# Altium PCB 6th design.PcbDoc
Units mil, origin at the board's own origin, x right, y up, seen from the top; angles counter-clockwise.
Board outline 6000 x 4000 mil, 2 copper layers (Top Layer, Bottom Layer); 142 components, 101 nets, 386 pads, 48 vias.
Unrouted connection lines stored in the file: 71.
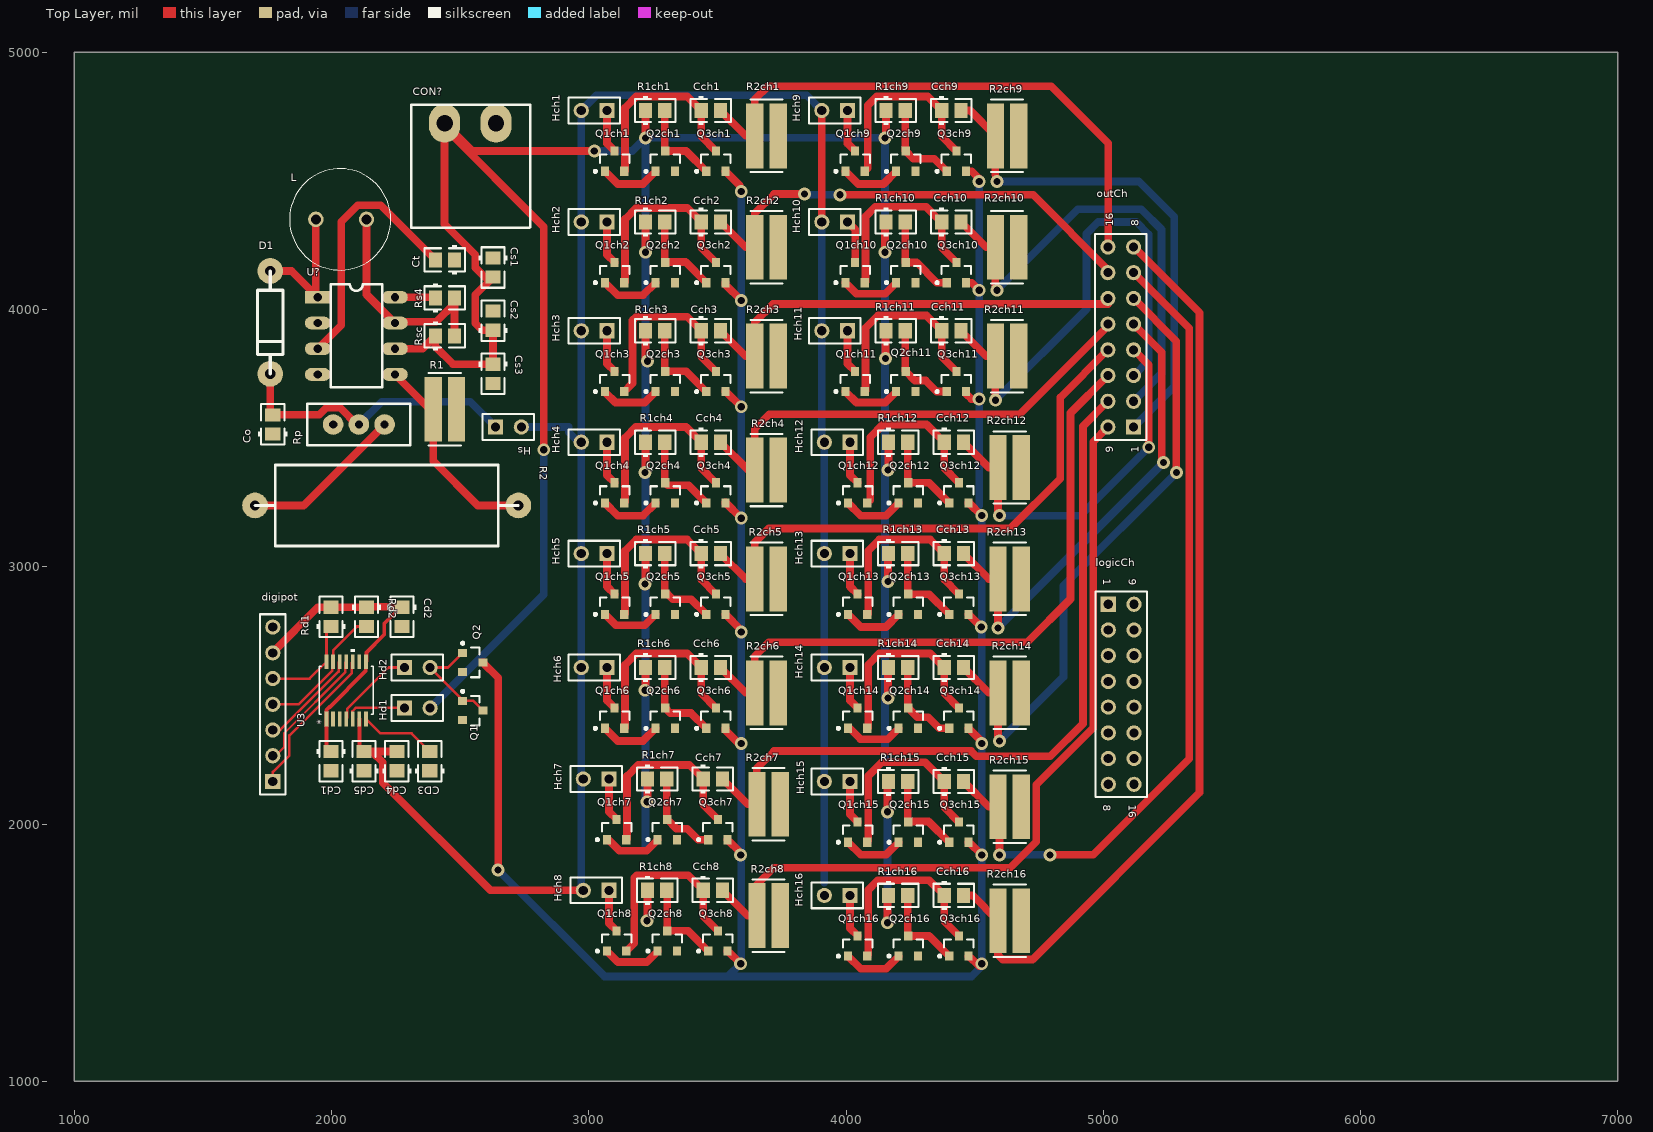
[diagram p0: Top Layer view]
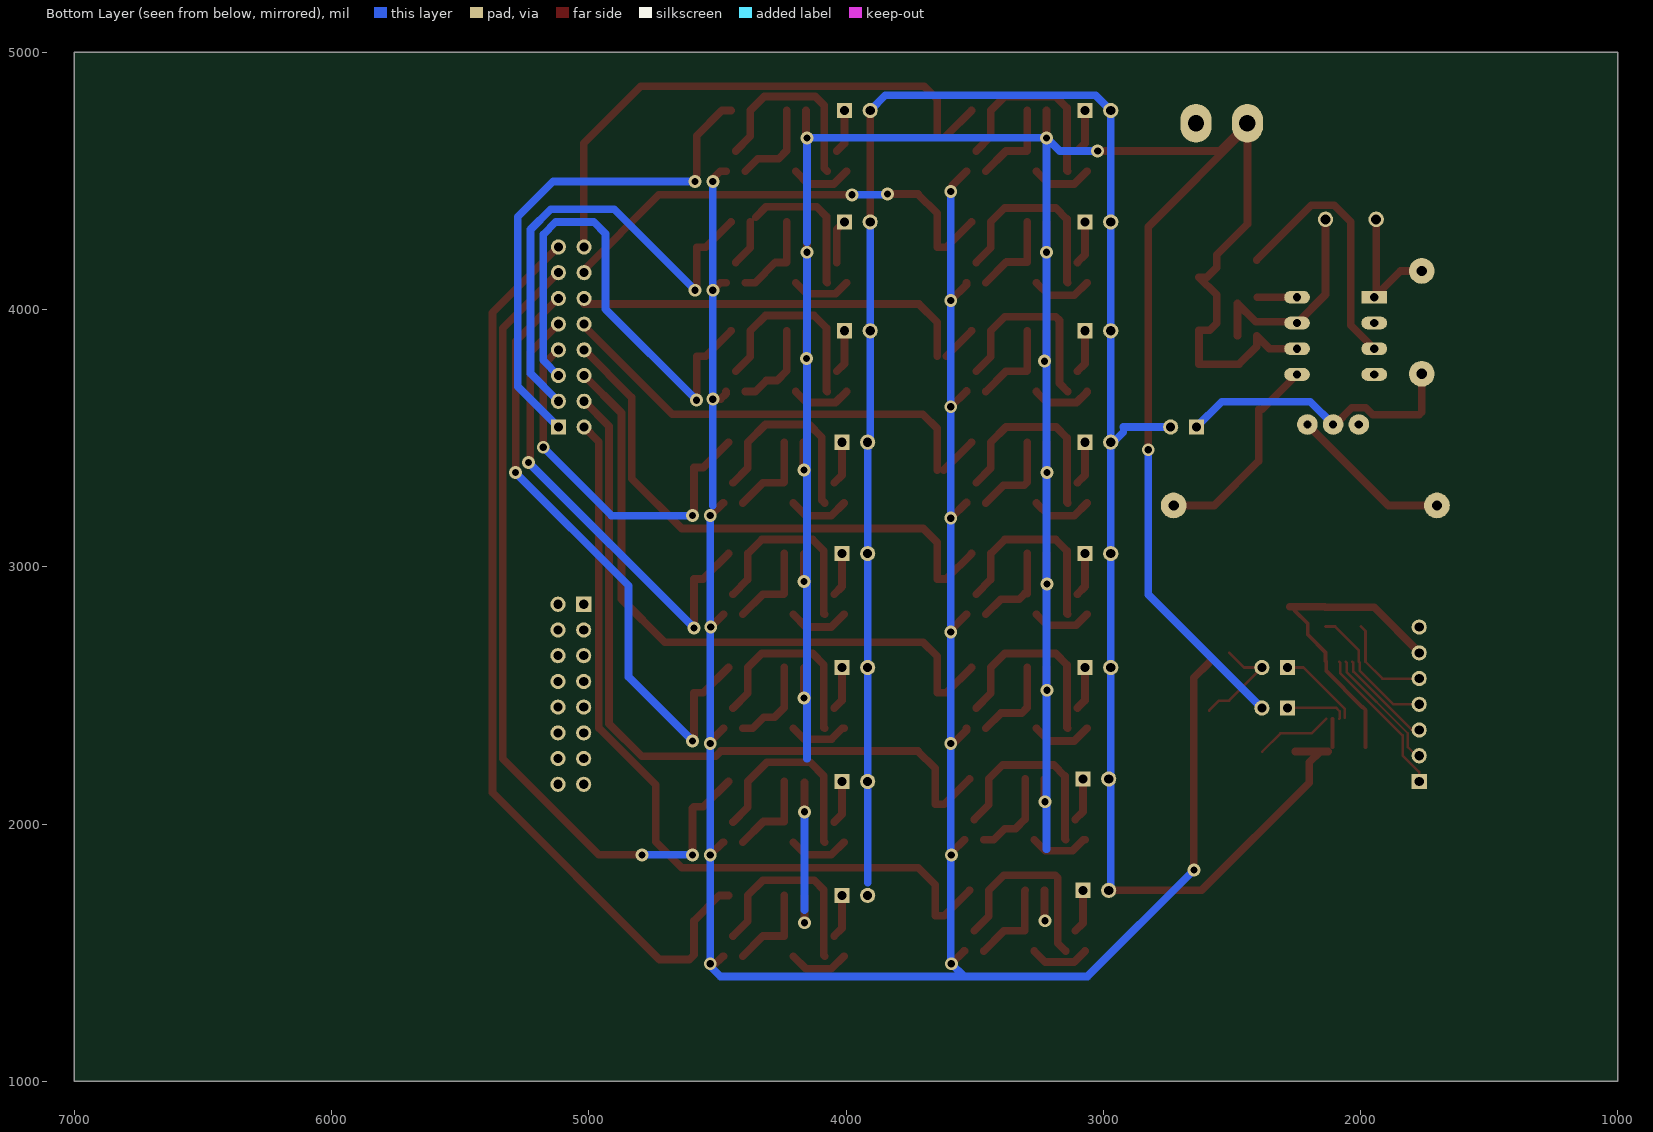
[diagram p1: Bottom Layer view, seen from below]

## Layer stack, top to bottom
Top Solder: solder mask 0.4, Solder Resist, Dk 3.5
Top Layer: signal copper 1.4
Dielectric 1: dielectric 12.6, FR-4, Dk 4.8
Bottom Layer: signal copper 1.4
Bottom Solder: solder mask 0.4, Solder Resist, Dk 3.5

## Board outline
1000,1000 7000,1000 7000,5000 1000,5000

## Design rules (kind name [scope] priority, off if disabled: settings)
Clearance [All] p1: gap=10
PolygonConnect [All] p1: connectstyle=Relief reliefconductorwidth=10 reliefentries=4 polygonreliefangle="90 Angle" airgapwidth=10
RoutingVias [All] p1: holewidth=28 width=50 viastyle="Through Hole" minholewidth=6 minwidth=50 maxholewidth=28 maxwidth=50
SolderMaskExpansion [All] p1: expansion=4
Width [All] p1: maxlimit=30 minlimit=6 preferedwidth=30
30 further rules are at their usual default settings.

## Classes and differential pairs
component class step-up: Co Cs1 Cs2 Cs3 Ct D1 Hs L R1 R2 Rp Rs4 Rsc U?
component class digipot: Cd1 Cd2 CD3 Cd4 Cd5 digipot Hd1 Hd2 Rd1 Rd2 U3
component class "6th design": Cch1 Cch2 Cch3 Cch4 Cch5 Cch6 Cch7 Cch8 Cch9 Cch10 Cch11 Cch12 Cch13 Cch14 Cch15 Cch16 CON? Hch1 Hch2 Hch3 Hch4 Hch5 Hch6 Hch7 Hch8 Hch9 Hch10 Hch11 Hch12 Hch13 Hch14 Hch15 Hch16 logicCh outCh Q1 Q1ch1 Q1ch2 Q1ch3 Q1ch4 Q1ch5 Q1ch6 Q1ch7 Q1ch8 Q1ch9 Q1ch10 Q1ch11 Q1ch12 Q1ch13 Q1ch14 Q1ch15 Q1ch16 Q2 Q2ch1 Q2ch2 Q2ch3 Q2ch4 Q2ch5 Q2ch6 Q2ch7 Q2ch8 Q2ch9 Q2ch10 Q2ch11 Q2ch12 Q2ch13 Q2ch14 Q2ch15 Q2ch16 Q3ch1 Q3ch2 Q3ch3 Q3ch4 Q3ch5 Q3ch6 Q3ch7 Q3ch8 Q3ch9 Q3ch10 Q3ch11 Q3ch12 Q3ch13 Q3ch14 Q3ch15 Q3ch16 R1ch1 R1ch2 R1ch3 R1ch4 R1ch5 R1ch6 R1ch7 R1ch8 R1ch9 R1ch10 R1ch11 R1ch12 R1ch13 R1ch14 R1ch15 R1ch16 R2ch1 R2ch2 R2ch3 R2ch4 R2ch5 R2ch6 R2ch7 R2ch8 R2ch9 R2ch10 R2ch11 R2ch12 R2ch13 R2ch14 R2ch15 R2ch16

## Components (designator, comment, footprint, x,y, rotation, side; value= is the part's Value field where it differs from the comment)
Cch1 "Cap-NP" CC2012-0805 3474.41,4773.62 r0 top
Cch2 "Cap-NP" CC2012-0805 3474.41,4340.55 r0 top
Cch3 "Cap-NP" CC2012-0805 3474.41,3917.32 r0 top
Cch4 "Cap-NP" CC2012-0805 3474.41,3484.25 r0 top
Cch5 "Cap-NP" CC2012-0805 3474.41,3051.18 r0 top
Cch6 "Cap-NP" CC2012-0805 3474.41,2608.27 r0 top
Cch7 "Cap-NP" CC2012-0805 3482.28,2175.2 r0 top
Cch8 "Cap-NP" CC2012-0805 3482.28,1742.13 r0 top
Cch9 "Cap-NP" CC2012-0805 4409.45,4773.62 r0 top
Cch10 "Cap-NP" CC2012-0805 4409.45,4340.55 r0 top
Cch11 "Cap-NP" CC2012-0805 4409.45,3917.32 r0 top
Cch12 "Cap-NP" CC2012-0805 4419.29,3484.25 r0 top
Cch13 "Cap-NP" CC2012-0805 4419.29,3051.18 r0 top
Cch14 "Cap-NP" CC2012-0805 4419.29,2608.27 r0 top
Cch15 "Cap-NP" CC2012-0805 4419.29,2165.35 r0 top
Cch16 "Cap-NP" CC2012-0805 4419.29,1722.44 r0 top
Cd1 "Cap-NP" CC2012-0805 1998.03,2244.09 r270 top
Cd2 "Cap-NP" CC2012-0805 2273.62,2805.12 r270 top
CD3 "Cap-NP" CC2012-0805 2381.87,2244.09 r90 top
Cd4 "Cap-NP" CC2012-0805 2253.94,2244.09 r90 top
Cd5 "Cap-NP" CC2012-0805 2125.98,2244.09 r90 top
Co "Cap-NP" CC2012-0805 1771.65,3553.15 r90 top
CON? "SOCKETS TERMINAL BLOCK 2PIN" "Sockets Terminal Block 2Pin" 2539.37,4724.41 r0 top
Cs1 "Cap-NP" CC2012-0805 2627.97,4163.39 r270 top
Cs2 "Cap-NP" CC2012-0805 2627.93,3956.69 r90 top
Cs3 "Cap-NP" CC2012-0805 2627.94,3750 r270 top
Ct "Cap-NP" CC2012-0805 2440.94,4192.91 r180 top
D1 "DIODE" D1N40XX 1761.81,3750 r90 top
digipot "Header 7" HDR1X7 1771.65,2165.35 r90 top
Hch1 "H2" HDR1X2 3070.87,4773.62 r180 top
Hch2 "H2" HDR1X2 3070.87,4340.55 r180 top
Hch3 "H2" HDR1X2 3070.87,3917.32 r180 top
Hch4 "H2" HDR1X2 3070.87,3484.25 r180 top
Hch5 "H2" HDR1X2 3070.87,3051.18 r180 top
Hch6 "H2" HDR1X2 3070.87,2608.27 r180 top
Hch7 "H2" HDR1X2 3078.74,2175.2 r180 top
Hch8 "H2" HDR1X2 3078.74,1742.13 r180 top
Hch9 "H2" HDR1X2 4005.91,4773.62 r180 top
Hch10 "H2" HDR1X2 4005.91,4340.55 r180 top
Hch11 "H2" HDR1X2 4005.91,3917.32 r180 top
Hch12 "H2" HDR1X2 4015.75,3484.25 r180 top
Hch13 "H2" HDR1X2 4015.75,3051.18 r180 top
Hch14 "H2" HDR1X2 4015.75,2608.27 r180 top
Hch15 "H2" HDR1X2 4015.75,2165.35 r180 top
Hch16 "H2" HDR1X2 4015.75,1722.44 r180 top
Hd1 "Hd1" HDR1X2 2283.46,2450.79 r0 top
Hd2 "Hd2" HDR1X2 2283.46,2608.27 r0 top
Hs "Hs" HDR1X2 2637.8,3543.31 r0 top
L "Component_1" PCBComponent_1 1938.98,4350.39 r0 top
logicCh "Header 8X2A" HDR2X8_CEN 5019.69,2854.33 r270 top
outCh "Header 8X2A" HDR2X8_CEN 5118.11,3543.31 r90 top
Q1 "MMBT4401LT1" ONSC-SOT-23-3-318-08_V 2549.21,2440.94 r0 top
Q1ch1 "MMBT4401LT1" ONSC-SOT-23-3-318-08_V 3100.39,4576.77 r90 top
Q1ch2 "MMBT4401LT1" ONSC-SOT-23-3-318-08_V 3100.39,4143.7 r90 top
Q1ch3 "MMBT4401LT1" ONSC-SOT-23-3-318-08_V 3100.39,3720.47 r90 top
Q1ch4 "MMBT4401LT1" ONSC-SOT-23-3-318-08_V 3100.39,3287.4 r90 top
Q1ch5 "MMBT4401LT1" ONSC-SOT-23-3-318-08_V 3100.39,2854.33 r90 top
Q1ch6 "MMBT4401LT1" ONSC-SOT-23-3-318-08_V 3100.39,2411.42 r90 top
Q1ch7 "MMBT4401LT1" ONSC-SOT-23-3-318-08_V 3108.27,1978.35 r90 top
Q1ch8 "MMBT4401LT1" ONSC-SOT-23-3-318-08_V 3108.27,1545.28 r90 top
Q1ch9 "MMBT4401LT1" ONSC-SOT-23-3-318-08_V 4035.43,4576.77 r90 top
Q1ch10 "MMBT4401LT1" ONSC-SOT-23-3-318-08_V 4035.43,4143.7 r90 top
Q1ch11 "MMBT4401LT1" ONSC-SOT-23-3-318-08_V 4035.43,3720.47 r90 top
Q1ch12 "MMBT4401LT1" ONSC-SOT-23-3-318-08_V 4045.28,3287.4 r90 top
Q1ch13 "MMBT4401LT1" ONSC-SOT-23-3-318-08_V 4045.28,2854.33 r90 top
Q1ch14 "MMBT4401LT1" ONSC-SOT-23-3-318-08_V 4045.28,2411.42 r90 top
Q1ch15 "MMBT4401LT1" ONSC-SOT-23-3-318-08_V 4045.28,1968.5 r90 top
Q1ch16 "MMBT4401LT1" ONSC-SOT-23-3-318-08_V 4045.28,1525.59 r90 top
Q2 "MMBT4401LT1" ONSC-SOT-23-3-318-08_V 2549.21,2627.95 r0 top
Q2ch1 "MMBT4401LT1" ONSC-SOT-23-3-318-08_V 3297.24,4576.77 r90 top
Q2ch2 "MMBT4401LT1" ONSC-SOT-23-3-318-08_V 3297.24,4143.7 r90 top
Q2ch3 "MMBT4401LT1" ONSC-SOT-23-3-318-08_V 3297.24,3720.47 r90 top
Q2ch4 "MMBT4401LT1" ONSC-SOT-23-3-318-08_V 3297.24,3287.4 r90 top
Q2ch5 "MMBT4401LT1" ONSC-SOT-23-3-318-08_V 3297.24,2854.33 r90 top
Q2ch6 "MMBT4401LT1" ONSC-SOT-23-3-318-08_V 3297.24,2411.42 r90 top
Q2ch7 "MMBT4401LT1" ONSC-SOT-23-3-318-08_V 3305.12,1978.35 r90 top
Q2ch8 "MMBT4401LT1" ONSC-SOT-23-3-318-08_V 3305.12,1545.28 r90 top
Q2ch9 "MMBT4401LT1" ONSC-SOT-23-3-318-08_V 4232.28,4576.77 r90 top
Q2ch10 "MMBT4401LT1" ONSC-SOT-23-3-318-08_V 4232.28,4143.7 r90 top
Q2ch11 "MMBT4401LT1" ONSC-SOT-23-3-318-08_V 4232.28,3720.47 r90 top
Q2ch12 "MMBT4401LT1" ONSC-SOT-23-3-318-08_V 4242.13,3287.4 r90 top
Q2ch13 "MMBT4401LT1" ONSC-SOT-23-3-318-08_V 4242.13,2854.33 r90 top
Q2ch14 "MMBT4401LT1" ONSC-SOT-23-3-318-08_V 4242.13,2411.42 r90 top
Q2ch15 "MMBT4401LT1" ONSC-SOT-23-3-318-08_V 4242.13,1968.5 r90 top
Q2ch16 "MMBT4401LT1" ONSC-SOT-23-3-318-08_V 4242.13,1525.59 r90 top
Q3ch1 "MMBT4401LT1" ONSC-SOT-23-3-318-08_V 3494.09,4576.77 r90 top
Q3ch2 "MMBT4401LT1" ONSC-SOT-23-3-318-08_V 3494.09,4143.7 r90 top
Q3ch3 "MMBT4401LT1" ONSC-SOT-23-3-318-08_V 3494.09,3720.47 r90 top
Q3ch4 "MMBT4401LT1" ONSC-SOT-23-3-318-08_V 3494.09,3287.4 r90 top
Q3ch5 "MMBT4401LT1" ONSC-SOT-23-3-318-08_V 3494.09,2854.33 r90 top
Q3ch6 "MMBT4401LT1" ONSC-SOT-23-3-318-08_V 3494.09,2411.42 r90 top
Q3ch7 "MMBT4401LT1" ONSC-SOT-23-3-318-08_V 3501.97,1978.35 r90 top
Q3ch8 "MMBT4401LT1" ONSC-SOT-23-3-318-08_V 3501.97,1545.28 r90 top
Q3ch9 "MMBT4401LT1" ONSC-SOT-23-3-318-08_V 4429.13,4576.77 r90 top
Q3ch10 "MMBT4401LT1" ONSC-SOT-23-3-318-08_V 4429.13,4143.7 r90 top
Q3ch11 "MMBT4401LT1" ONSC-SOT-23-3-318-08_V 4429.13,3720.47 r90 top
Q3ch12 "MMBT4401LT1" ONSC-SOT-23-3-318-08_V 4438.98,3287.4 r90 top
Q3ch13 "MMBT4401LT1" ONSC-SOT-23-3-318-08_V 4438.98,2854.33 r90 top
Q3ch14 "MMBT4401LT1" ONSC-SOT-23-3-318-08_V 4438.98,2411.42 r90 top
Q3ch15 "MMBT4401LT1" ONSC-SOT-23-3-318-08_V 4438.98,1968.5 r90 top
Q3ch16 "MMBT4401LT1" ONSC-SOT-23-3-318-08_V 4438.98,1525.59 r90 top
R1 "ERJ-A1BJ1R2U" Panasonic_ERJ-A1BJ1R2U_0 2440.94,3612.2 r270 top
R1ch1 "Res" CC2012-0805 3257.87,4773.62 r0 top
R1ch2 "Res" CC2012-0805 3257.87,4340.55 r0 top
R1ch3 "Res" CC2012-0805 3257.87,3917.32 r0 top
R1ch4 "Res" CC2012-0805 3257.87,3484.25 r0 top
R1ch5 "Res" CC2012-0805 3257.87,3051.18 r0 top
R1ch6 "Res" CC2012-0805 3257.87,2608.27 r0 top
R1ch7 "Res" CC2012-0805 3265.75,2175.2 r0 top
R1ch8 "Res" CC2012-0805 3265.75,1742.13 r0 top
R1ch9 "Res" CC2012-0805 4192.91,4773.62 r0 top
R1ch10 "Res" CC2012-0805 4192.91,4340.55 r0 top
R1ch11 "Res" CC2012-0805 4192.91,3917.32 r0 top
R1ch12 "Res" CC2012-0805 4202.76,3484.25 r0 top
R1ch13 "Res" CC2012-0805 4202.76,3051.18 r0 top
R1ch14 "Res" CC2012-0805 4202.76,2608.27 r0 top
R1ch15 "Res" CC2012-0805 4202.76,2165.35 r0 top
R1ch16 "Res" CC2012-0805 4202.76,1722.44 r0 top
R2 "Res" R5W 2214.57,3238.19 r0 top
R2ch1 "ERJ-A1BJ1R2U" Panasonic_ERJ-A1BJ1R2U_0 3690.94,4675.2 r270 top
R2ch2 "ERJ-A1BJ1R2U" Panasonic_ERJ-A1BJ1R2U_0 3690.94,4242.13 r270 top
R2ch3 "ERJ-A1BJ1R2U" Panasonic_ERJ-A1BJ1R2U_0 3690.94,3818.9 r270 top
R2ch4 "ERJ-A1BJ1R2U" Panasonic_ERJ-A1BJ1R2U_0 3690.94,3375.98 r270 top
R2ch5 "ERJ-A1BJ1R2U" Panasonic_ERJ-A1BJ1R2U_0 3690.94,2952.76 r270 top
R2ch6 "ERJ-A1BJ1R2U" Panasonic_ERJ-A1BJ1R2U_0 3690.94,2509.84 r270 top
R2ch7 "ERJ-A1BJ1R2U" Panasonic_ERJ-A1BJ1R2U_0 3698.82,2076.77 r270 top
R2ch8 "ERJ-A1BJ1R2U" Panasonic_ERJ-A1BJ1R2U_0 3698.82,1643.7 r270 top
R2ch9 "ERJ-A1BJ1R2U" Panasonic_ERJ-A1BJ1R2U_0 4625.98,4675.2 r270 top
R2ch10 "ERJ-A1BJ1R2U" Panasonic_ERJ-A1BJ1R2U_0 4625.98,4242.13 r270 top
R2ch11 "ERJ-A1BJ1R2U" Panasonic_ERJ-A1BJ1R2U_0 4625.98,3818.9 r270 top
R2ch12 "ERJ-A1BJ1R2U" Panasonic_ERJ-A1BJ1R2U_0 4635.83,3385.83 r270 top
R2ch13 "ERJ-A1BJ1R2U" Panasonic_ERJ-A1BJ1R2U_0 4635.83,2952.76 r270 top
R2ch14 "ERJ-A1BJ1R2U" Panasonic_ERJ-A1BJ1R2U_0 4635.83,2509.84 r270 top
R2ch15 "ERJ-A1BJ1R2U" Panasonic_ERJ-A1BJ1R2U_0 4635.83,2066.93 r270 top
R2ch16 "ERJ-A1BJ1R2U" Panasonic_ERJ-A1BJ1R2U_0 4635.83,1624.02 r270 top
Rd1 "Res" CC2012-0805 1998.03,2805.12 r90 top
Rd2 "Res" CC2012-0805 2135.83,2805.12 r270 top
Rp "RPot" VR_MUL-V 2106.3,3553.15 r180 top
Rs4 "Res" CC2012-0805 2440.95,4045.28 r0 top
Rsc "Res" CC2012-0805 2440.95,3897.64 r0 top
U3 "AD5292BRUZ-100-N" RU_14 2057.09,2519.68 r90 top
U? "DS1307" DIP8L 2096.46,3897.64 r0 top

## Footprints (in the part's own frame and the unit in brackets; to place one, negate y for a bottom-side part, rotate by r counter-clockwise, add the part's x,y. Pads: shape width x height; smd on the part's side, far side on the other; paste and mask are expansions set on the pad)
CC2012-0805 [mm]
  rect 1.3x1.5 smd: 1(-0.95,0) 2(0.95,0)
  silkscreen extent -2,-1.45 2,1.44
D1N40XX [mil]
  round 100 hole 40: 1(0,0) 2(400,0)
  silkscreen extent 0,-50 400,50
DIP8L [mil]
  rect 100x50 hole 32: 1(-150,150)
  oval 100x50 hole 32: 2(-150,50) 3(-150,-50) 4(-150,-150) 5(150,-150) 6(150,-50) 7(150,50) 8(150,150)
  silkscreen extent -100,-200 100,200
HDR1X2 [mm] "Connector; Header; 2 Position"
  rect 1.5x1.5 hole 0.9: 1(0,0)
  round 1.5 hole 0.9: 2(2.54,0)
  silkscreen extent -1.27,-1.27 3.81,1.27
HDR1X7 [mm] "Connector; Header; 7 Position"
  rect 1.5x1.5 hole 0.9: 1(0,0)
  round 1.5 hole 0.9: 2(2.54,0) 3(5.08,0) 4(7.62,0) 5(10.16,0) 6(12.7,0) 7(15.24,0)
  silkscreen extent -1.27,-1.27 16.51,1.27
HDR2X8_CEN [mm] "Connector; Header; 8x2 Position"
  rect 1.5x1.5 hole 0.9: 1(0,0)
  round 1.5 hole 0.9: 2(2.54,0) 3(5.08,0) 4(7.62,0) 5(10.16,0) 6(12.7,0) 7(15.24,0) 8(17.78,0) 9(0,2.54) 10(2.54,2.54) 11(5.08,2.54) 12(7.62,2.54) 13(10.16,2.54) 14(12.7,2.54) 15(15.24,2.54) 16(17.78,2.54)
  silkscreen extent -1.27,-1.27 19.05,3.81
ONSC-SOT-23-3-318-08_V [mm] "SOT23, 3-Leads, Body 2.92x1.3mm, Pitch 0.95mm"
  rect 0.9x0.8 smd: 1(-1,0.95) 2(-1,-0.95) 3(1,0)
  silkscreen extent -1.12,-1.46 0.65,2.02, body extent -0.65,-1.46 0.65,1.46, height 1.11
Panasonic_ERJ-A1BJ1R2U_0 [mm]
  rect 6.4x1.7 smd paste+0 mask+0: 1(0,1.15) 2(0,-1.15)
  silkscreen extent -3.57,-1.6 3.57,1.6, body extent -3.4,-2.1 3.4,2.1, height 0.25
PCBComponent_1 [mil]
  round 60 hole 39.37: 1(0,0) 2(196.85,0)
  silkscreen extent -102,-197 291,197
R5W [mil]
  round 100 hole 40: 1(-511.81,0) 2(511.81,0)
  silkscreen extent -512,-157 512,157
RU_14 [mil]
  rect 58x14 smd paste+0 mask+0: 1(-111,76.77) 2(-111,51.18) 3(-111,25.59) 4(-111,0) 5(-111,-25.59) 6(-111,-51.18) 7(-111,-76.77) 8(111,-76.77) 9(111,-51.18) 10(111,-25.59) 11(111,0) 12(111,25.59) 13(111,51.18) 14(111,76.77)
  silkscreen extent -94,-106 160,105, body extent 0,0 10,10, height 10
"Sockets Terminal Block 2Pin" [mil]
  oval 120x150 hole 64: 1(-100,0) 2(100,0)
  silkscreen extent -230,-406 233,72
VR_MUL-V [mil]
  round 80 hole 32: 1(-100,0) 2(0,0) 3(100,0)
  silkscreen extent -200,-80 200,80

## Part data
Cch1 Cch2 Cch3 Cch4 Cch5 Cch6 Cch7 Cch8 Cch9 Cch10 Cch11 Cch12 Cch13 Cch14 Cch15 Cch16 Cd1 Cd2 CD3 Cd4 Cd5 Co Cs1 Cs2 Cs3 Ct: "Capacitor"
digipot: "Header, 7-Pin"
Hch1 Hch2 Hch3 Hch4 Hch5 Hch6 Hch7 Hch8 Hch9 Hch10 Hch11 Hch12 Hch13 Hch14 Hch15 Hch16 Hd1 Hd2 Hs: library part "Header 2", "Header, 2-Pin"
L: "power inductor"
logicCh outCh: "Header, 8-Pin, Dual row"
Q1 Q1ch1 Q1ch2 Q1ch3 Q1ch4 Q1ch5 Q1ch6 Q1ch7 Q1ch8 Q1ch9 Q1ch10 Q1ch11 Q1ch12 Q1ch13 Q1ch14 Q1ch15 Q1ch16 Q2 Q2ch1 Q2ch2 Q2ch3 Q2ch4 Q2ch5 Q2ch6 Q2ch7 Q2ch8 Q2ch9 Q2ch10 Q2ch11 Q2ch12 Q2ch13 Q2ch14 Q2ch15 Q2ch16 Q3ch1 Q3ch2 Q3ch3 Q3ch4 Q3ch5 Q3ch6 Q3ch7 Q3ch8 Q3ch9 Q3ch10 Q3ch11 Q3ch12 Q3ch13 Q3ch14 Q3ch15 Q3ch16: "Switching Transistor, NPN Silicon, 3-Pin SOT-23, Tape and Reel"
R1ch1 R1ch2 R1ch3 R1ch4 R1ch5 R1ch6 R1ch7 R1ch8 R1ch9 R1ch10 R1ch11 R1ch12 R1ch13 R1ch14 R1ch15 R1ch16 R2 Rd1 Rd2 Rs4 Rsc: "Resistor"
Rp: "Potentiometer"
U3: "Imported"

## Via types
v1: diameter 50, hole 28, Top Layer to Bottom Layer, 48 vias

## Nets (pads, with @x,y where several pads share a name; then routed paths per layer and width w, separated by ;. In a path a pad name is that pad's centre, name@x,y a point inside that pad or via, vN(x,y) a via of type N, cw(c..) or ccw(c..) an arc to the next point about the centre after c; other vN are vias at no path point)
3V: Cd1.1 Cd2.1 digipot.6 Rd1.2 Rd2.1 U3.1 U3.8 | length 1221.9
  Top Layer w15: Cd1.1@1980.32,2299.21 U3.1 1980.32,2441.98 1981.41,2443.07 1981.41,2444.93 1991.66,2455.18 1993.52,2455.18 2132.77,2594.44 2132.77,2629.59 U3.8 ; U3.8@2135.81,2632.64 2135.81,2667.31 2204.72,2736.22 2204.72,2779.04 Cd2.1@2256.4,2830.71 ; Rd2.1@2135.81,2840.32 Rd2.1@2139.98,2844.49
  Top Layer w30: digipot.6@1770.67,2666.34 1946.85,2842.52 Rd2.1 ; Rd2.1@2139.98,2844.49 Cd2.1@2273.62,2844.49
5V: CON?.1 Cs1.2 Cs2.1 Cs3.1 Hd1.2 R1ch1.1 R1ch2.1 R1ch3.1 R1ch4.1 R1ch5.1 R1ch6.1 R1ch7.1 R1ch8.1 R1ch9.1 R1ch10.1 R1ch11.1 R1ch12.1 R1ch13.1 R1ch14.1 R1ch15.1 R1ch16.1 Rsc.1 U?.6 | length 13202.2
  Top Layer w30: U?.6 2353.54,3847.64 Rsc.1 2403.54,3856.3 2472.44,3787.4 Cs3.1 Cs2.1 2586.61,3919.29 2559.06,3946.85 2559.06,4057.07 Cs1.2 2596.46,4125.98 2559.06,4163.39 2559.06,4212.6 2439.37,4332.28 CON?.1@2439.37,4706.3 ; v1(2824.8,3454.72) 2824.8,4320.87 CON?.1@2439.37,4706.3 ; v1@3011.81,4616.14 2547.64,4616.14 CON?.1 CON?.1@2439.37,4706.3 ; v1@3220.47,2521.65 R1ch6.1 ; v1@3220.47,2935.04 R1ch5.1 ; v1@3220.47,3368.11 R1ch4.1 ; v1@3220.47,3807.09 R1ch3.1 ; v1(3220.47,4222.44) R1ch2.1 ; v1(3220.47,4667.32) R1ch1.1 ; v1@3228.35,1625.98 R1ch8.1 ; v1@3228.35,2088.58 R1ch7.1 ; v1(4151.57,4222.44) R1ch10.1@4151.57,4336.61 ; v1(4153.54,3809.06) R1ch11.1@4153.54,3915.35 ; v1@4155.51,4671.26 R1ch9.1 ; v1(4161.42,1616.14) R1ch16.1@4161.42,1718.5 ; v1(4161.42,2047.24) R1ch15.1@4161.42,2161.42 ; v1(4163.39,2490.16) R1ch14.1@4163.39,2606.3 ; v1(4163.39,2942.91) R1ch13.1@4163.39,3049.21 ; v1(4163.39,3375.98) 4165.35,3377.95 R1ch12.1
  Bottom Layer w30: Hd1.2 2824.8,2892.13 v1(2824.8,3454.72) ; v1(3021.65,4616.14) 3169.29,4616.14 v1(3220.47,4667.32) ; 3220.47,1901.57 3220.47,4261.81 v1(3220.47,4667.32) ; 4151.57,2253.94 v1(4151.57,4222.44) ; 4151.57,4261.81 v1(4151.57,4667.32) v1(3220.47,4667.32) ; 4161.42,1665.35 v1(4161.42,2047.24)
  other v1: 3226.38,1624.02 3226.38,2086.61 3218.5,2519.69 3218.5,2933.07 3218.5,3366.14 3228.35,3799.21
19V: Cd4.2 Cd5.2 Hch1.2 Hch2.2 Hch3.2 Hch4.2 Hch5.2 Hch6.2 Hch7.2 Hch8.2 Hch9.2 Hch10.2 Hch11.2 Hch12.2 Hch13.2 Hch14.2 Hch15.2 Hch16.2 Hs.2 U3.6 | length 8547.8
  Top Layer w15: Cd5.2@2108.27,2299.21 U3.6
  Top Layer w30: Cd5.2 2157.48,2281.5 ; Cd4.2 2157.48,2281.5 ; Hch8.2@2970.87,1742.13 2618.11,1742.13 2199.41,2160.83 2199.41,2239.57 2157.48,2281.5 ; Hch10.2 Hch9.2
  Bottom Layer w30: Hs.2 2921.65,3543.31 ; 2921.65,3523.62 2961.02,3484.25 Hch4.2 ; Hch8.2@2970.87,1742.13 Hch1.2 3029.92,4832.68 3846.85,4832.68 Hch9.2 ; Hch12.2@3905.91,3484.25 Hch11.2 ; Hch11.2@3905.91,3946.85 Hch10.2 ; 3915.75,1771.65 Hch15.2 ; Hch15.2@3915.75,2175.2 Hch14.2 Hch13.2 Hch12.2
CH1: Cch1.2 outCh.16 R2ch1.2 | length 2170.7
  Top Layer w30: Cch1.2 3610.24,4675.2 ; R2ch1.2 3645.67,4816.93 3696.89,4868.15 4797.2,4868.15 5019.69,4645.67 outCh.16@5019.69,4243.31
CH2: Cch2.2 outCh.15 R2ch2.2 | length 1839.9
  Top Layer w30: Cch2.2 3610.24,4242.13 R2ch2.2 3645.67,4374.02 3720.47,4448.82 v1(3838.58,4448.82) ; v1(3976.38,4445.82) 4727.41,4445.82 outCh.15@5024.02,4149.21
  Bottom Layer w30: v1(3838.58,4448.82) 3841.58,4445.82 v1(3976.38,4445.82)
CH3: Cch3.2 outCh.14 R2ch3.2 | length 1672.9
  Top Layer w30: Cch3.2 3610.24,3818.9 ; R2ch3.2 3645.67,3950.79 3716.5,4021.61 outCh.14@5018.11,4021.61
CH4: Cch4.2 outCh.13 R2ch4.2 | length 1851.8
  Top Layer w30: Cch4.2 R2ch4.2@3620.08,3375.98 ; R2ch4.2 3645.67,3537.4 3701.42,3593.15 4675.83,3593.15 outCh.13@5018.11,3935.43
CH5: Cch5.2 outCh.12 R2ch5.2 | length 2183.7
  Top Layer w30: Cch5.2 3610.24,2952.76 R2ch5.2 3645.67,3094.49 3700,3148.82 4638.9,3148.82 4832.42,3342.34 4832.42,3657.61 outCh.12
CH6: Cch6.2 outCh.11 R2ch6.2 | length 2564.7
  Top Layer w30: Cch6.2 3610.24,2509.84 R2ch6.2 3645.67,2651.57 3700.79,2706.69 4704.72,2706.69 4872.58,2874.54 4872.58,3597.77 outCh.11
CH7: Cch7.2 outCh.10 R2ch7.2 | length 2964.3
  Top Layer w30: Cch7.2 3618.11,2076.77 R2ch7.2 3653.54,2216.54 3720.47,2283.46 4486.38,2283.46 4506.85,2262.99 4794.09,2262.99 4921.26,2390.16 4921.26,3546.46 outCh.10
CH8: Cch8.2 outCh.9 R2ch8.2 | length 3177.9
  Top Layer w30: Cch8.2 3618.11,1643.7 R2ch8.2 3653.54,1763.78 3719.69,1829.92 4638.9,1829.92 4739.57,1930.59 4739.57,2151.9 4961.26,2373.59 4961.26,3486.46 outCh.9
CH9: Cch9.2 outCh.1 R2ch9.2 | length 1954.4
  Top Layer w30: Cch9.2 4482.28,4773.62 R2ch9.2 4580.71,4523.62
  Bottom Layer w30: v1(4586.61,4498.03) 5137.8,4498.03 5275.59,4360.24 5275.59,3700.79 outCh.1
CH10: Cch10.2 outCh.2 R2ch10.2 | length 1859.8
  Top Layer w30: Cch10.2 4545.28,4242.13 R2ch10.2 4580.71,4080.71 v1(4586.61,4074.8)
  Bottom Layer w30: v1(4586.61,4074.8) 4901.57,4389.76 5147.64,4389.76 5226.38,4311.02 5226.38,3751.57 outCh.2
CH11: Cch11.2 outCh.3 R2ch11.2 | length 1994.1
  Top Layer w30: Cch11.2 4545.28,3818.9 R2ch11.2 v1(4580.71,3647.64)
  Bottom Layer w30: v1(4580.71,3647.64) 4934.78,4001.71 4934.78,4295.02 4980.31,4340.55 5127.95,4340.55 5177.17,4291.34 5177.17,3802.36 outCh.3
CH12: Cch12.2 outCh.4 R2ch12.2 | length 1449.7
  Top Layer w30: Cch12.2 4555.12,3385.83 R2ch12.2 v1@4590.55,3204.72 ; outCh.4 5177.17,3784.25 v1(5177.17,3464.57)
  Bottom Layer w30: v1(4596.46,3198.82) 4911.42,3198.82 v1(5177.17,3464.57)
CH13: Cch13.2 outCh.5 R2ch13.2 | length 1861.8
  Top Layer w30: Cch13.2 4555.12,2952.76 R2ch13.2 v1(4590.55,2761.81) ; outCh.5 5227.17,3834.25 5227.17,3412.6 v1(5234.25,3405.51)
  Bottom Layer w30: v1(4590.55,2761.81) v1(5234.25,3405.51)
CH14: Cch14.2 outCh.6 R2ch14.2 | length 2429.5
  Top Layer w30: Cch14.2 4555.12,2509.84 R2ch14.2 v1@4590.55,2328.74 ; outCh.6 5284.25,3877.17 v1(5284.25,3366.3)
  Bottom Layer w30: v1(4596.46,2322.83) 4845.21,2571.59 4845.21,2925.92 v1@5284.92,3365.63
CH15: Cch15.2 outCh.7 R2ch15.2 | length 3226.4
  Top Layer w30: Cch15.2 4555.12,2066.93 R2ch15.2 4596.46,2061.02 v1(4596.46,1879.92) ; v1(4793.31,1879.92) 4960.63,1879.92 5334.65,2253.94 5334.65,3926.77 outCh.7
  Bottom Layer w30: v1(4596.46,1879.92) v1@4783.46,1879.92
CH16: Cch16.2 outCh.8 R2ch16.2 | length 3594.5
  Top Layer w30: Cch16.2 4492.13,1722.44 R2ch16.2 4590.55,1492.13 4609.65,1473.03 4724.92,1473.03 5374.65,2122.75 5374.65,3986.77 outCh.8
CLK: digipot.2 U3.11 | length 490.2
  Top Layer w10: digipot.2 1783.07,2265.35 1816.18,2298.46 1816.18,2352.77 2053.5,2590.08 2053.5,2627.09 U3.11
CS: digipot.3 U3.12 | length 389.8
  Top Layer w10: digipot.3 1800.48,2365.35 2027.91,2592.78 2027.91,2627.09 U3.12
GND: Cd1.2 Cd2.2 CD3.1 Cd4.1 Cd5.1 Co.1 CON?.2 Cs1.1 Cs2.2 Cs3.2 Ct.1 digipot.7 Q1.2 Q2.2 Q2ch1.2 Q2ch2.2 Q2ch3.2 Q2ch4.2 Q2ch5.2 Q2ch6.2 Q2ch7.2 Q2ch8.2 Q2ch9.2 Q2ch10.2 Q2ch11.2 Q2ch12.2 Q2ch13.2 Q2ch14.2 Q2ch15.2 Q2ch16.2 R1.1 R2ch1.1 R2ch2.1 R2ch3.1 R2ch4.1 R2ch5.1 R2ch6.1 R2ch7.1 R2ch8.1 R2ch9.1 R2ch10.1 R2ch11.1 R2ch12.1 R2ch13.1 R2ch14.1 R2ch15.1 R2ch16.1 U3.2 U3.9 U?.2 U?.4
LOGICCH1: logicCh.1 Q1ch1.1 Q2ch1.1 | length 237.6
  Top Layer w30: Q1ch1.1 3112.2,4488.19 3210.63,4488.19 Q2ch1.1
LOGICCH2: logicCh.2 Q1ch2.1 Q2ch2.1 | length 237.6
  Top Layer w30: Q1ch2.1 3112.2,4055.12 3210.63,4055.12 Q2ch2.1
LOGICCH3: logicCh.3 Q1ch3.1 Q2ch3.1 | length 233.4
  Top Layer w30: Q1ch3.1 3062.99,3679.13 3103.74,3638.39 3217.13,3638.39 Q2ch3.1
LOGICCH4: logicCh.4 Q1ch4.1 Q2ch4.1 | length 237.6
  Top Layer w30: Q1ch4.1 3112.2,3198.82 3210.63,3198.82 Q2ch4.1
LOGICCH5: logicCh.5 Q1ch5.1 Q2ch5.1 | length 232.2
  Top Layer w30: Q1ch5.1 3105.71,2772.24 3217.13,2772.24 Q2ch5.1
LOGICCH6: logicCh.6 Q1ch6.1 Q2ch6.1 | length 237.6
  Top Layer w30: Q1ch6.1 3112.2,2322.83 3210.63,2322.83 Q2ch6.1
LOGICCH7: logicCh.7 Q1ch7.1 Q2ch7.1 | length 232.2
  Top Layer w30: Q1ch7.1 3076.85,1938.98 3119.57,1896.26 3225,1896.26 Q2ch7.1
LOGICCH8: logicCh.8 Q1ch8.1 Q2ch8.1 | length 232.2
  Top Layer w30: Q1ch8.1 3113.58,1463.19 3225,1463.19 Q2ch8.1
LOGICCH9: logicCh.9 Q1ch9.1 Q2ch9.1 | length 237.6
  Top Layer w30: Q1ch9.1 4047.24,4488.19 4145.67,4488.19 Q2ch9.1
LOGICCH10: logicCh.10 Q1ch10.1 Q2ch10.1 | length 232.2
  Top Layer w30: Q1ch10.1 4040.75,4061.61 4152.17,4061.61 Q2ch10.1
LOGICCH11: logicCh.11 Q1ch11.1 Q2ch11.1 | length 232.2
  Top Layer w30: Q1ch11.1 4040.75,3638.39 4152.17,3638.39 Q2ch11.1
LOGICCH12: logicCh.12 Q1ch12.1 Q2ch12.1 | length 237.6
  Top Layer w30: Q1ch12.1 4057.09,3198.82 4155.51,3198.82 Q2ch12.1
LOGICCH13: logicCh.13 Q1ch13.1 Q2ch13.1 | length 237.6
  Top Layer w30: Q1ch13.1 4057.09,2765.75 4155.51,2765.75 Q2ch13.1
LOGICCH14: logicCh.14 Q1ch14.1 Q2ch14.1 | length 232.2
  Top Layer w30: Q1ch14.1 4013.86,2372.05 4056.57,2329.33 4162.01,2329.33 Q2ch14.1
LOGICCH15: logicCh.15 Q1ch15.1 Q2ch15.1 | length 237.6
  Top Layer w30: Q1ch15.1 4057.09,1879.92 4155.51,1879.92 Q2ch15.1
LOGICCH16: logicCh.16 Q1ch16.1 Q2ch16.1 | length 237.6
  Top Layer w30: Q1ch16.1 4057.09,1437.01 4155.51,1437.01 Q2ch16.1
MISO: digipot.4 Rd2.2 U3.13 | length 534
  Top Layer w10: digipot.4 1872.2,2465.35 2002.32,2595.47 2002.32,2627.09 U3.13 2005.91,2675.2 2098.43,2767.72 Rd2.2
MOSI: digipot.1 U3.10 | length 594.2
  Top Layer w10: digipot.1 1771.65,2202.38 1836.18,2266.91 1836.18,2344.49 2079.09,2587.39 2079.09,2627.09 U3.10
NetCch1_1: Cch1.1 Q1ch1.2 Q3ch1.3 | length 766.3
  Top Layer w30: Q1ch1.2 3141.14,4540.75 3141.14,4784.84 3184.45,4828.15 3382.48,4828.15 Cch1.1 3437.01,4673.23 Q3ch1.3
NetCch2_1: Cch2.1 Q1ch2.2 Q3ch2.3 | length 766.3
  Top Layer w30: Q1ch2.2 3141.14,4107.68 3141.14,4351.69 3184.53,4395.08 3382.48,4395.08 Cch2.1 3437.01,4240.16 Q3ch2.3
NetCch3_1: Cch3.1 Q1ch3.2 Q3ch3.3 | length 766.3
  Top Layer w30: Q1ch3.2 3169.88,3713.19 3169.88,3957.21 3184.53,3971.85 3382.48,3971.85 Cch3.1 3437.01,3816.93 Q3ch3.3
NetCch4_1: Cch4.1 Q1ch4.2 Q3ch4.3 | length 773.5
  Top Layer w30: Q1ch4.2 3141.14,3251.38 3141.14,3501.34 3183.11,3543.31 3377.95,3543.31 Cch4.1 3437.01,3383.86 Q3ch4.3
NetCch5_1: Cch5.1 Q1ch5.2 Q3ch5.3 | length 766.3
  Top Layer w30: Q1ch5.2 3141.14,2818.31 3141.14,3062.32 3184.53,3105.71 3382.48,3105.71 Cch5.1 3437.01,2950.79 Q3ch5.3
NetCch6_1: Cch6.1 Q1ch6.2 Q3ch6.3 | length 766.3
  Top Layer w30: Q1ch6.2 3141.14,2375.39 3141.14,2619.41 3184.53,2662.8 3382.48,2662.8 Cch6.1 3437.01,2507.87 Q3ch6.3
NetCch7_1: Cch7.1 Q1ch7.2 Q3ch7.3 | length 766.3
  Top Layer w30: Q1ch7.2 3149.02,1942.32 3149.02,2186.34 3192.4,2229.72 3390.35,2229.72 Cch7.1 3444.88,2074.8 Q3ch7.3
NetCch8_1: Cch8.1 Q1ch8.2 Q3ch8.3 | length 774.9
  Top Layer w30: Q1ch8.2 3176.38,1536.61 3176.38,1789.88 3187.01,1800.51 3386.49,1800.51 Cch8.1 3444.88,1641.73 Q3ch8.3
NetCch9_1: Cch9.1 Q1ch9.2 Q3ch9.3 | length 766.3
  Top Layer w30: Q1ch9.2 4084.65,4549.21 4084.65,4793.31 4119.49,4828.15 4317.52,4828.15 Cch9.1 4372.05,4673.23 Q3ch9.3
NetCch10_1: Cch10.1 Q1ch10.2 Q3ch10.3 | length 747.4
  Top Layer w30: Q1ch10.2 4076.18,4107.68 4076.18,4361.61 4114.17,4399.61 4311.02,4399.61 Cch10.1@4351.38,4359.25 ; Cch10.1 4372.05,4240.16 Q3ch10.3
NetCch11_1: Cch11.1 Q1ch11.2 Q3ch11.3 | length 770.1
  Top Layer w30: Q1ch11.2 4076.18,3684.45 4076.18,3928.54 4124.02,3976.38 4312.99,3976.38 Cch11.1 4372.05,3816.93 Q3ch11.3
NetCch12_1: Cch12.1 Q1ch12.2 Q3ch12.3 | length 778.2
  Top Layer w30: Q1ch12.2 4094.49,3259.84 4094.49,3503.86 4143.78,3553.15 4312.99,3553.15 Cch12.1 4381.89,3383.86 Q3ch12.3
NetCch13_1: Cch13.1 Q1ch13.2 Q3ch13.3 | length 766.3
  Top Layer w30: Q1ch13.2 4086.02,2818.31 4086.02,3062.32 4129.41,3105.71 4327.36,3105.71 Cch13.1 4381.89,2950.79 Q3ch13.3
NetCch14_1: Cch14.1 Q1ch14.2 Q3ch14.3 | length 766.3
  Top Layer w30: Q1ch14.2 4086.02,2375.39 4086.02,2619.41 4129.41,2662.8 4327.36,2662.8 Cch14.1 4381.89,2507.87 Q3ch14.3
NetCch15_1: Cch15.1 Q1ch15.2 Q3ch15.3 | length 788.9
  Top Layer w30: Q1ch15.2 4086.02,1932.48 4086.02,2186.42 4139.72,2240.12 4307.13,2240.12 Cch15.1 4381.89,2064.96 Q3ch15.3
NetCch16_1: Cch16.1 Q1ch16.2 Q3ch16.3 | length 775.9
  Top Layer w30: Q1ch16.2 4086.02,1489.57 4086.02,1743.5 4124.02,1781.5 4322.83,1781.5 Cch16.1 4381.89,1622.05 Q3ch16.3
NetCD3_2: CD3.2 U3.7 | length 300.7
  Top Layer w10: U3.7 2190.18,2352.36 2311,2352.36 CD3.2
NetCo_2: Co.2 D1.1 Hs.1 Rp.2 | length 1131.6
  Top Layer w30: Co.2@1761.81,3600.39 D1.1 ; Co.2 1951.78,3590.55 1979.38,3618.15 2033.22,3618.15 2098.22,3553.15 Rp.2
  Bottom Layer w30: Rp.2 2194.88,3641.73 2539.37,3641.73 Hs.1
NetCt_2: Ct.2 U?.3 | length 1011.6
  Top Layer w30: U?.3 2037.4,3938.58 2037.4,4340.55 2102.24,4405.39 2191.06,4405.39 Ct.2
NetD1_2: D1.2 L.1 U?.1 | length 511.7
  Top Layer w30: D1.2 1844.09,4150 1938.98,4055.12 L.1
NetHch1_1: Hch1.1 Q1ch1.3 | length 169.7
  Top Layer w30: Hch1.1 3070.87,4645.67 Q1ch1.3
NetHch2_1: Hch2.1 Q1ch2.3 | length 169.7
  Top Layer w30: Hch2.1 3070.87,4212.6 Q1ch2.3
NetHch3_1: Hch3.1 Q1ch3.3 | length 169.7
  Top Layer w30: Hch3.1 3070.87,3789.37 Q1ch3.3
NetHch4_1: Hch4.1 Q1ch4.3 | length 169.7
  Top Layer w30: Hch4.1 3070.87,3356.3 Q1ch4.3
NetHch5_1: Hch5.1 Q1ch5.3 | length 169.7
  Top Layer w30: Hch5.1 3070.87,2923.23 Q1ch5.3
NetHch6_1: Hch6.1 Q1ch6.3 | length 169.7
  Top Layer w30: Hch6.1 3070.87,2480.32 Q1ch6.3
NetHch7_1: Hch7.1 Q1ch7.3 | length 169.7
  Top Layer w30: Hch7.1 3078.74,2047.24 Q1ch7.3
NetHch8_1: Hch8.1 Q1ch8.3 | length 169.7
  Top Layer w30: Hch8.1 3078.74,1614.17 Q1ch8.3
NetHch9_1: Hch9.1 Q1ch9.3 | length 169.7
  Top Layer w30: Hch9.1 4005.91,4645.67 Q1ch9.3
NetHch10_1: Hch10.1 Q1ch10.3 | length 169.7
  Top Layer w30: Hch10.1 4035.43,4311.02 Q1ch10.3
NetHch11_1: Hch11.1 Q1ch11.3 | length 169.7
  Top Layer w30: Hch11.1 4005.91,3789.37 Q1ch11.3
NetHch12_1: Hch12.1 Q1ch12.3 | length 169.7
  Top Layer w30: Hch12.1 4015.75,3356.3 Q1ch12.3
NetHch13_1: Hch13.1 Q1ch13.3 | length 169.7
  Top Layer w30: Hch13.1 4015.75,2923.23 Q1ch13.3
NetHch14_1: Hch14.1 Q1ch14.3 | length 169.7
  Top Layer w30: Hch14.1 4015.75,2480.32 Q1ch14.3
NetHch15_1: Hch15.1 Q1ch15.3 | length 169.7
  Top Layer w30: Hch15.1 4015.75,2037.4 Q1ch15.3
NetHch16_1: Hch16.1 Q1ch16.3 | length 169.7
  Top Layer w30: Hch16.1 4015.75,1594.49 Q1ch16.3
NetHd1_1: Hd1.1 U3.5 | length 240
  Top Layer w10: U3.5 2080.68,2410.68 2080.68,2438.31 2095.05,2452.68 2281.57,2452.68 Hd1.1
NetHd2_1: Hd2.1 U3.4 | length 324.1
  Top Layer w10: U3.4@2060.68,2412.28 2060.68,2446.59 2222.35,2608.27 Hd2.1
NetL_2: L.2 Rs4.2 Rsc.2 U?.7 | length 840.6
  Top Layer w30: L.2 2135.83,4058.27 U?.7 2246.46,3952.17 2406.89,3952.17 2478.35,4023.62 Rsc.2
NetQ2ch1_3: Q2ch1.3 Q3ch1.1 R1ch1.2 | length 347.6
  Top Layer w30: Q2ch1.3@3295.28,4618.11 R1ch1.2 ; Q2ch1.3 3377.95,4616.14 Q3ch1.1
NetQ2ch2_3: Q2ch2.3 Q3ch2.1 R1ch2.2 | length 350.4
  Top Layer w30: R1ch2.2 3295.28,4185.04 3375.98,4185.04 Q3ch2.1
NetQ2ch3_3: Q2ch3.3 Q3ch3.1 R1ch3.2 | length 347.6
  Top Layer w30: Q2ch3.3@3295.28,3761.81 R1ch3.2 ; Q2ch3.3 3377.95,3759.84 Q3ch3.1
NetQ2ch4_3: Q2ch4.3 Q3ch4.1 R1ch4.2 | length 350.4
  Top Layer w30: R1ch4.2 3295.28,3328.74 Q2ch4.3 3307.09,3316.93 3387.8,3316.93 Q3ch4.1
NetQ2ch5_3: Q2ch5.3 Q3ch5.1 R1ch5.2 | length 350.4
  Top Layer w30: R1ch5.2 3295.28,2895.67 3305.12,2895.67 3326.77,2874.02 3397.64,2874.02 Q3ch5.1
NetQ2ch6_3: Q2ch6.3 Q3ch6.1 R1ch6.2 | length 350.4
  Top Layer w30: R1ch6.2 3295.28,2452.76 Q2ch6.3 3316.93,2431.1 3397.64,2431.1 Q3ch6.1
NetQ2ch7_3: Q2ch7.3 Q3ch7.1 R1ch7.2 | length 350.4
  Top Layer w30: R1ch7.2 3303.15,2019.68 Q2ch7.3 3341.14,1981.69 3383.27,1981.69 3425.98,1938.98 Q3ch7.1
NetQ2ch8_3: Q2ch8.3 Q3ch8.1 R1ch8.2 | length 350.4
  Top Layer w30: R1ch8.2 3305.12,1740.16 Q2ch8.3 3385.83,1584.65 Q3ch8.1
NetQ2ch9_3: Q2ch9.3 Q3ch9.1 R1ch9.2 | length 347.6
  Top Layer w30: Q2ch9.3@4230.31,4618.11 R1ch9.2 ; Q2ch9.3 4261.81,4586.61 4342.52,4586.61 Q3ch9.1
NetQ2ch10_3: Q2ch10.3 Q3ch10.1 R1ch10.2 | length 350.4
  Top Layer w30: R1ch10.2 4230.31,4185.04 Q2ch10.3 4274.41,4183.07 4353.15,4104.33 Q3ch10.1
NetQ2ch11_3: Q2ch11.3 Q3ch11.1 R1ch11.2 | length 347.6
  Top Layer w30: Q2ch11.3@4230.31,3761.81 R1ch11.2 ; Q2ch11.3 4268.31,3723.82 4310.43,3723.82 4353.15,3681.1 Q3ch11.1
NetQ2ch12_3: Q2ch12.3 Q3ch12.1 R1ch12.2 | length 347.6
  Top Layer w30: Q2ch12.3@4240.16,3328.74 R1ch12.2 ; Q2ch12.3 4322.83,3326.77 Q3ch12.1
NetQ2ch13_3: Q2ch13.3 Q3ch13.1 R1ch13.2 | length 347.6
  Top Layer w30: Q2ch13.3@4240.16,2895.67 R1ch13.2 ; Q2ch13.3 4322.83,2893.7 Q3ch13.1
NetQ2ch14_3: Q2ch14.3 Q3ch14.1 R1ch14.2 | length 350.4
  Top Layer w30: R1ch14.2 4240.16,2452.76 Q2ch14.3 4278.15,2414.76 4320.28,2414.76 4362.99,2372.05 Q3ch14.1
NetQ2ch15_3: Q2ch15.3 Q3ch15.1 R1ch15.2 | length 350.4
  Top Layer w30: R1ch15.2 4240.16,2009.84 4320.87,2009.84 Q3ch15.1
NetQ2ch16_3: Q2ch16.3 Q3ch16.1 R1ch16.2 | length 351.5
  Top Layer w30: R1ch16.2 4240.16,1564.96 4322.83,1564.96 Q3ch16.1
NetR1_2: R1.2 R2.2 U?.5 | length 794.8
  Top Layer w30: U?.5 R1.2@2381.89,3612.2 ; R1.2 2395.67,3411.42 2568.9,3238.19 R2.2
NetR2_1: R2.1 Rp.1 | length 634
  Top Layer w30: R2.1 1891.34,3238.19 Rp.1
NetRs4_1: Rs4.1 U?.8 | length 154.7
  Top Layer w30: U?.8 Rs4.1@2401.18,4047.64
OUT: Q2.3 Q3ch1.2 Q3ch2.2 Q3ch3.2 Q3ch4.2 Q3ch5.2 Q3ch6.2 Q3ch7.2 Q3ch8.2 Q3ch9.2 Q3ch10.2 Q3ch11.2 Q3ch12.2 Q3ch13.2 Q3ch14.2 Q3ch15.2 Q3ch16.2 | length 10165.7
  Top Layer w30: Q2.3 2647.64,2568.9 v1(2647.64,1820.87) ; Q3ch6.2 3531.5,2364.17 3582.68,2312.99 v1(3592.52,2312.99) ; Q3ch5.2 v1@3590.55,2755.91 ; Q3ch4.2 3531.5,3250 v1(3592.52,3188.98) ; Q3ch3.2 3531.5,3683.07 v1(3592.52,3622.05) ; Q3ch2.2 3531.5,4096.46 v1(3592.52,4035.43) ; Q3ch1.2 v1@3586.61,4482.28 ; Q3ch8.2 3541.34,1505.91 v1(3590.55,1456.69) ; Q3ch7.2 3590.55,1887.8 v1(3590.55,1879.92) ; v1@3590.55,2746.06 v1(3592.52,2746.06) ; Q3ch11.2 4466.54,3673.23 4488.19,3651.57 v1(4517.72,3651.57) ; Q3ch10.2 4488.19,4104.33 v1(4517.72,4074.8) ; Q3ch9.2 4488.19,4537.4 4517.72,4507.87 v1(4517.72,4498.03) ; Q3ch16.2 4478.35,1486.22 v1@4517.72,1446.85 ; Q3ch15.2 4478.35,1929.13 v1(4527.56,1879.92) ; Q3ch14.2 4525.59,2322.83 v1@4527.56,2322.83 ; Q3ch13.2 v1(4525.59,2765.75) v1@4527.56,2765.75 ; Q3ch12.2 4478.35,3248.03 v1(4527.56,3198.82)
  Bottom Layer w30: v1(2647.64,1820.87) 3061.02,1407.48 3541.34,1407.48 ; v1(3590.55,1456.69) 3541.34,1407.48 ; v1@3592.52,1458.66 v1(3592.52,2312.99) v1(3592.52,2746.06) ; 3592.52,2775.59 v1(3592.52,3622.05) v1(3592.52,4035.43) ; v1@3592.52,4045.28 v1(3592.52,4458.66) ; 4517.72,3238.19 v1(4517.72,4074.8) v1(4517.72,4498.03) ; v1(4527.56,3198.82) v1(4527.56,2312.99) v1(4527.56,1879.92) 4527.56,1446.85 4488.19,1407.48 3541.34,1407.48
  other v1: 4527.56,1456.69
RDY: digipot.5 Rd1.1 U3.14 | length 380.1
  Top Layer w10: digipot.5 1914.98,2565.35 U3.14 1980.32,2750 Rd1.1
ROUT: Hd2.2 Q1.1 Q1.3 Q2.1 | length 423
  Top Layer w10: Q1.1 2551.18,2478.35 Q1.3 ; Q1.1@2509.84,2481.89 Hd2.2 2452.76,2608.27 Q2.1
pads on no net: Rp.3 U3.3

## Text inside footprints (layer, text, board x,y; h text height)
logicCh: Top Overlay "9" at 5099.69,2954.33 h30 r270; Top Overlay "1" at 4999.69,2954.33 h30 r270; Top Overlay "8" at 4999.69,2074.33 h30 r270; Top Overlay "16" at 5099.69,2074.33 h30 r270
outCh: Top Overlay "9" at 5038.11,3443.31 h30 r90; Top Overlay "1" at 5138.11,3443.31 h30 r90; Top Overlay "8" at 5138.11,4323.31 h30 r90; Top Overlay "16" at 5038.11,4323.31 h30 r90
U3: Top Overlay "*" at 1971.32,2386.18 h30 r90; Mechanical 13 "*" at 2009.59,2433.68 h30 r90